# Altium PCB pcb.PcbDoc (part 5 of 6)
Units mm, origin at the board's own origin, x right, y up, seen from the top; angles counter-clockwise.
Board outline 163.6 x 137.4 mm, 4 copper layers (Top Layer, GND2, GND3, Bottom Layer), stack 1.586 mm thick; 362 components, 323 nets, 1261 pads, 657 vias.
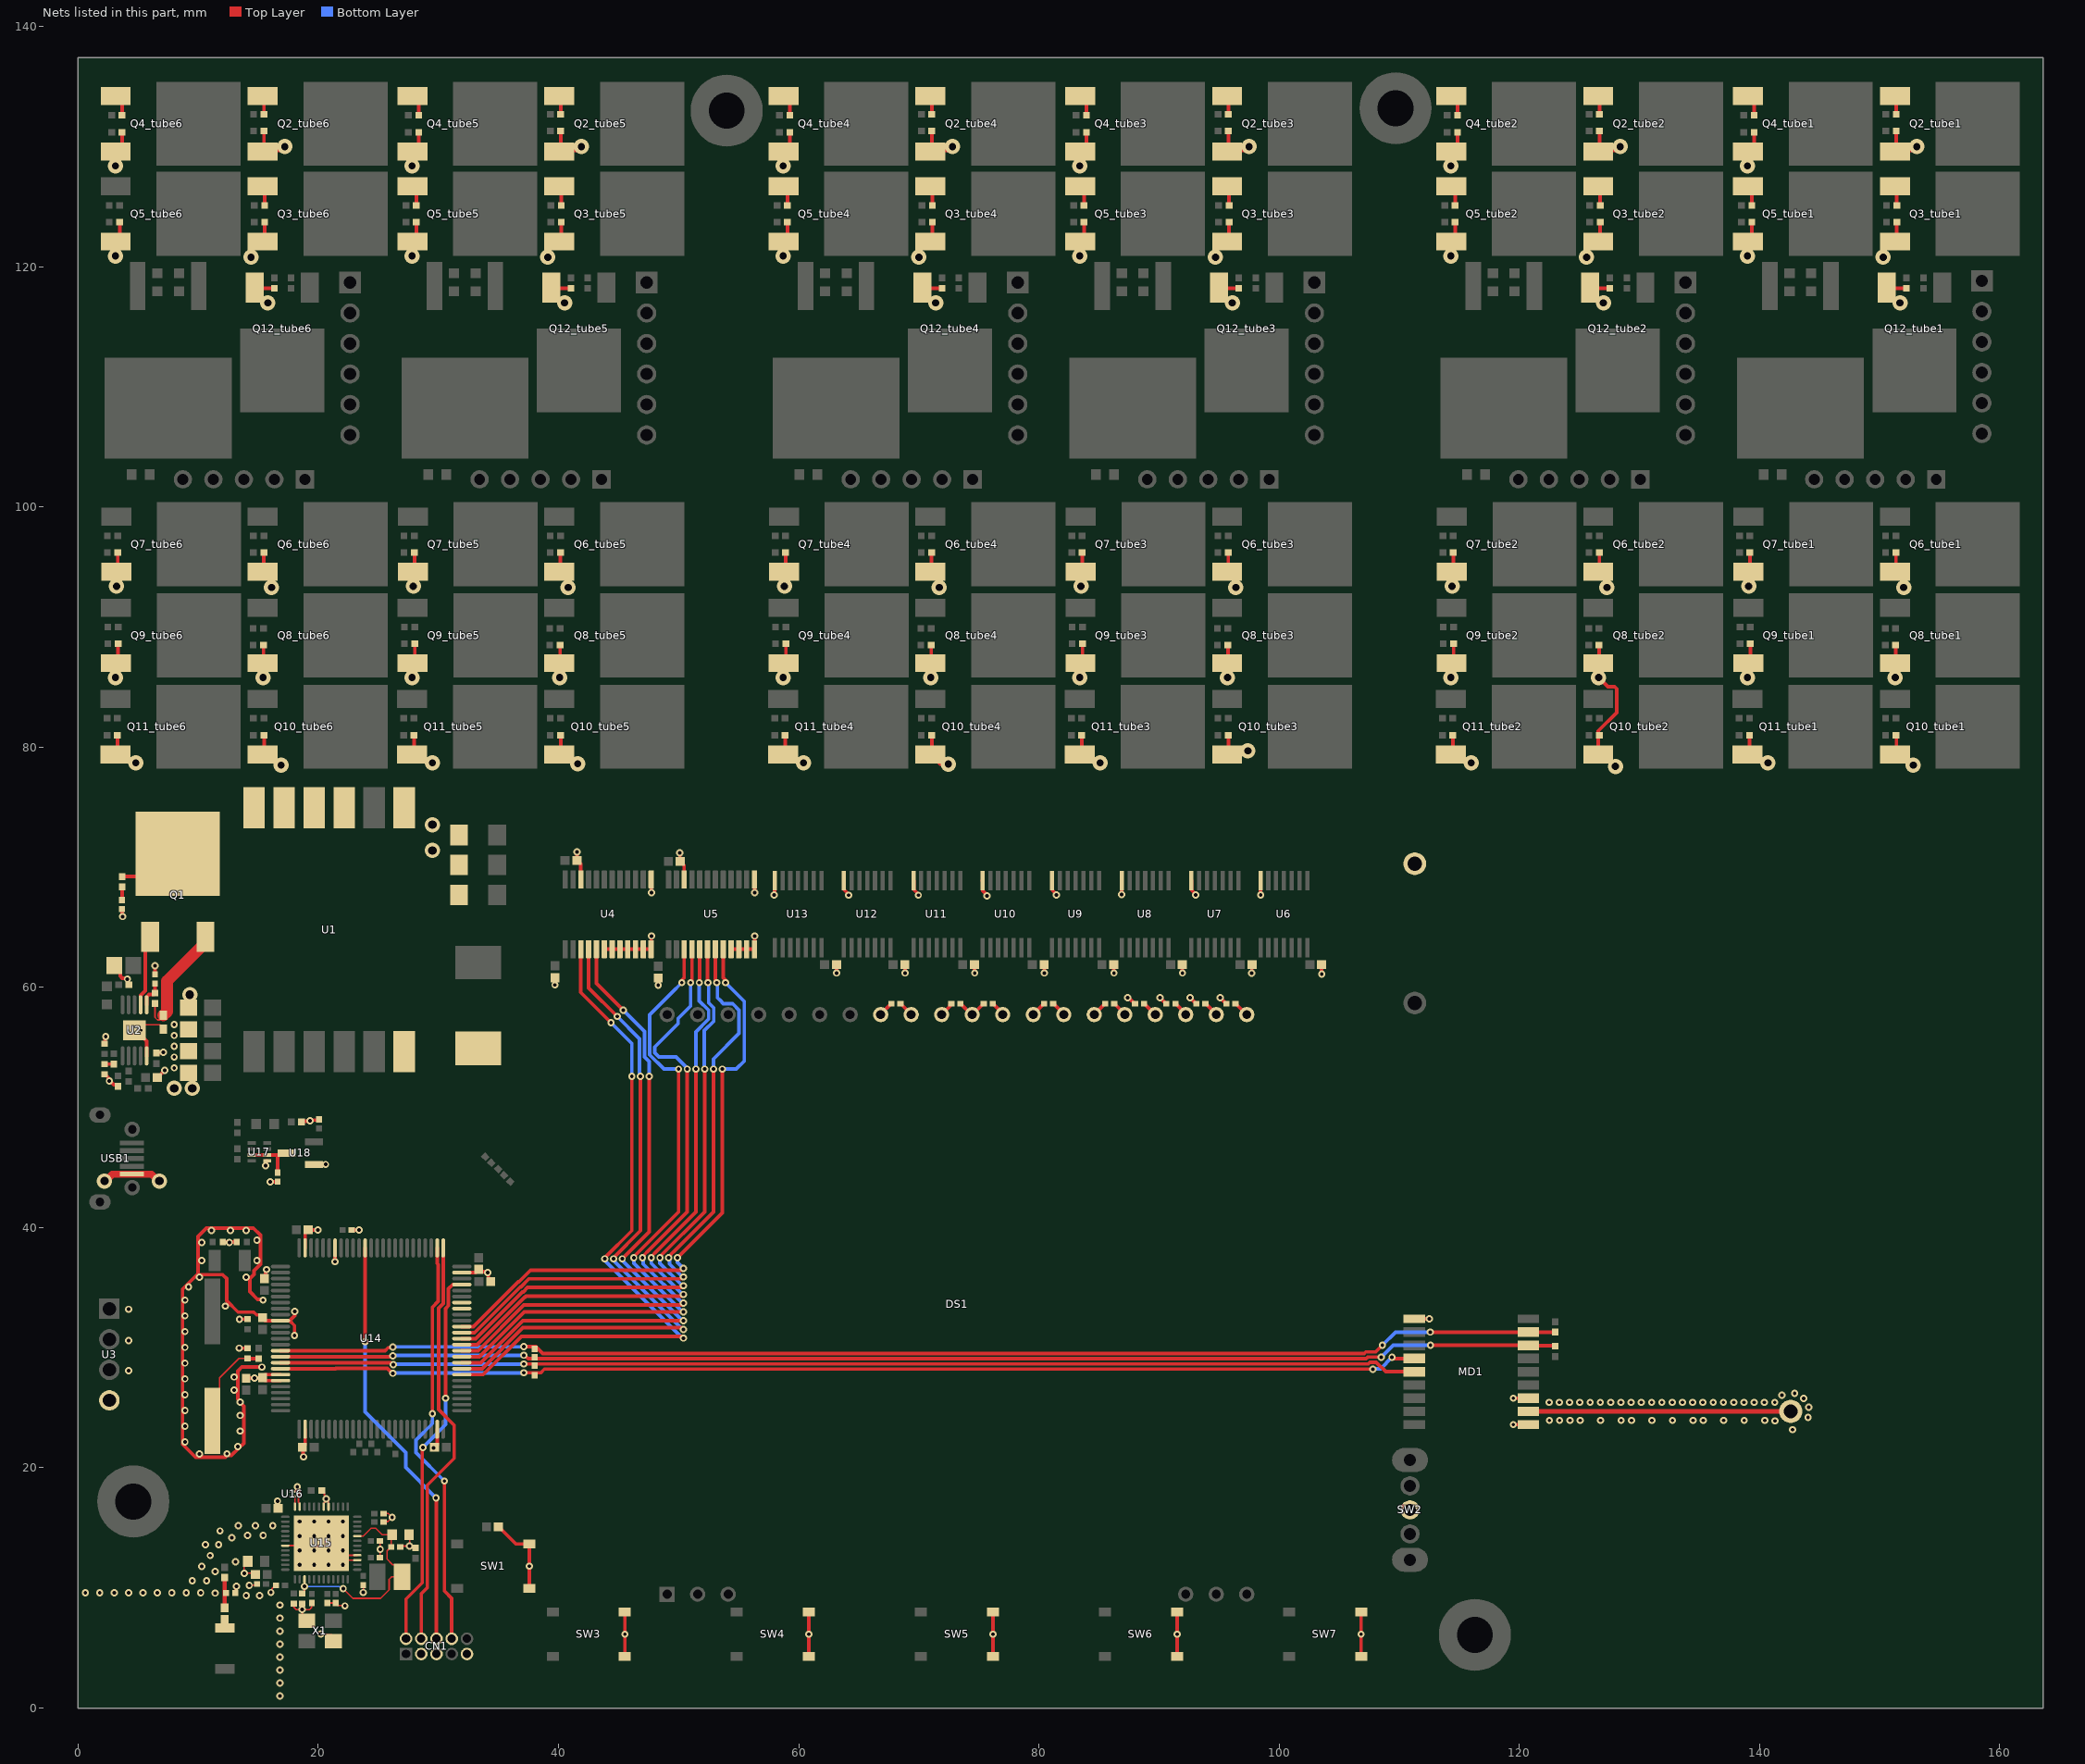
[diagram p6: the nets of this part, all layers, seen from the top]

## Via types
v1: diameter 0.6, hole 0.3, Top Layer to Bottom Layer, 545 vias
v2: diameter 1.27, hole 0.6, Top Layer to Bottom Layer, 97 vias
v3: diameter 1.27, hole 0.711, Top Layer to Bottom Layer, 13 vias
v4: diameter 0.5, hole 0.2, Top Layer to Bottom Layer, 2 vias

## Nets (pads, with @x,y where several pads share a name; then routed paths per layer and width w, separated by ;. In a path a pad name is that pad's centre, name@x,y a point inside that pad or via, vN(x,y) a via of type N, cw(c..) or ccw(c..) an arc to the next point about the centre after c; other vN are vias at no path point) (continued)
GND: C1.1 C2.1 C3.1 C4.1 C5.2 C6.2 C7.2 C8.2 C9.1 C10.1 C11.1 C12.1 C13.2 C14.1 C15.1 C16.1 C17.1 C18.1 C19.1 C20.1 C21.1 C22.1 C23.1 C24.1 C25.1 C26.2 C27.2 C28.2 C29.2 C30.1 C31.1 C32.1 C33.2 C34.2 C35.1 C36.1 C37.2 C38.2 C39.2 C40.2 C42.2 C43.2 C44.2 C45.2 C46.2 C47.2 C48.2 C49.2 C50.2 C51.2 C52.2 C53.2 C54.2 C56.2 C59.2 C60.2 C61.2 C62.2 C63.2 C64.1 C65.1 C66.2 C67.2 C68.2 C69.2 CN1.3 CN1.5 CN1.9 DS1.26 DS1.33 L3.2 MD1.1 MD1.10 MD1.12 Q2_tube1.3 Q2_tube2.3 Q2_tube3.3 Q2_tube4.3 Q2_tube5.3 Q2_tube6.3 Q3_tube1.3 Q3_tube2.3 Q3_tube3.3 Q3_tube4.3 Q3_tube5.3 Q3_tube6.3 Q4_tube1.3 Q4_tube2.3 Q4_tube3.3 Q4_tube4.3 Q4_tube5.3 Q4_tube6.3 Q5_tube1.3 Q5_tube2.3 Q5_tube3.3 Q5_tube4.3 Q5_tube5.3 Q5_tube6.3 Q6_tube1.3 Q6_tube2.3 Q6_tube3.3 Q6_tube4.3 Q6_tube5.3 Q6_tube6.3 Q7_tube1.3 Q7_tube2.3 Q7_tube3.3 Q7_tube4.3 Q7_tube5.3 Q7_tube6.3 Q8_tube1.3 Q8_tube2.3 Q8_tube3.3 Q8_tube4.3 Q8_tube5.3 Q8_tube6.3 Q9_tube1.3 Q9_tube2.3 Q9_tube3.3 Q9_tube4.3 Q9_tube5.3 Q9_tube6.3 Q10_tube1.3 Q10_tube2.3 Q10_tube3.3 Q10_tube4.3 Q10_tube5.3 Q10_tube6.3 Q11_tube1.3 Q11_tube2.3 Q11_tube3.3 Q11_tube4.3 Q11_tube5.3 Q11_tube6.3 Q12_tube1.3 Q12_tube2.3 Q12_tube3.3 Q12_tube4.3 Q12_tube5.3 Q12_tube6.3 R6.1 R7.1 R8.1 R9.1 R11_tube1.2 R11_tube2.2 R11_tube3.2 R11_tube4.2 R11_tube5.2 R11_tube6.2 R13_tube1.2 R13_tube2.2 R13_tube3.2 R13_tube4.2 R13_tube5.2 R13_tube6.2 R15_tube1.2 R15_tube2.2 R15_tube3.2 R15_tube4.2 R15_tube5.2 R15_tube6.2 R17_tube1.2 R17_tube2.2 R17_tube3.2 R17_tube4.2 R17_tube5.2 R17_tube6.2 R19_tube1.2 R19_tube2.2 R19_tube3.2 R19_tube4.2 R19_tube5.2 R19_tube6.2 R21_tube1.2 R21_tube2.2 R21_tube3.2 R21_tube4.2 R21_tube5.2 R21_tube6.2 R23_tube1.2 R23_tube2.2 R23_tube3.2 R23_tube4.2 R23_tube5.2 R23_tube6.2 R25_tube1.2 R25_tube2.2 R25_tube3.2 R25_tube4.2 R25_tube5.2 R25_tube6.2 R27_tube1.2 R27_tube2.2 R27_tube3.2 R27_tube4.2 R27_tube5.2 R27_tube6.2 R29_tube1.2 R29_tube2.2 R29_tube3.2 R29_tube4.2 R29_tube5.2 R29_tube6.2 R32_tube1.1 R32_tube2.1 R32_tube3.1 R32_tube4.1 R32_tube5.1 R32_tube6.1 R37.2 R38.2 R44.1 SW1.1 SW1.3 SW2.2 SW3.2 SW3.4 SW4.2 SW4.4 SW5.2 SW5.4 SW6.2 SW6.4 SW7.2 SW7.4 U1.1 U2.5 U2.11 U3.4 U4.6 U4.7 U4.8 U4.9 U4.10 U4.11 U4.12 U4.13 U4.22 U5.9 U5.10 U5.11 U5.12 U5.13 U5.22 U6.7 U7.7 U8.7 U9.7 U10.7 U11.7 U12.7 U13.7 U14.10 U14.19 U14.20 U14.27 U14.49 U14.74 U14.94 U14.99 U15.7 U15.27 U15.28 U15.41 U15.42 U15.47 U15.49 U15.50 U15.51 U15.52 U15.53 U15.54 U15.55 U15.56 U15.57 U15.58 U15.59 U15.60 U15.61 U15.62 U15.63 U15.64 U15.65 U16.B1 U17.1 U18.1 U20.2 USB1.5 X1.2 X1.4 | length 426.1
  Top Layer w0.127: U2.11@5.175,56.9 6.8,56.9 7.1,56.6 R8.1@7.1,56.525 ; C39.2@14.148,12.323 13.827,12.002 v1(13.827,11.223) 14.658,11.223 C30.1@14.758,11.123 ; v1(14.248,10.223) 14.791,10.223 C40.2@14.891,10.323 ; v1(16.048,9.623) 16.139,9.714 16.139,9.914 16.448,10.223 C51.2@16.47,10.223 ; v1(16.598,17.223) 16.598,16.663 C27.2@16.638,16.623 ; U15.7@16.988,13.523 20.048,13.523 U15.49@20.248,13.723 U15.49@21.248,12.723 ; C43.2@17.948,8.703 17.948,8.423 18.17,8.201 v1@18.66,8.201 ; U16.B1@18.048,18.023 18.048,18.045 18.158,18.154 18.158,18.333 v1(18.248,18.423) 18.248,18.295 18.448,18.095 18.448,17.834 18.343,17.728 18.343,17.501 18.339,17.497 18.339,17.152 18.448,17.043 U15.47@18.448,16.773 ; C42.2@18.648,8.703 18.661,8.691 v1(18.661,8.201) ; X1.4@19.048,7.273 18.661,7.661 v1(18.661,8.201) ; C47.2@19.448,8.744 19.448,8.387 19.262,8.201 v1(18.661,8.201) ; v1(20.205,6.167) 20.262,6.11 21.112,6.11 X1.2@21.349,5.873 ; R38.2@20.281,18.123 20.294,18.123 20.501,17.917 20.501,17.699 20.648,17.551 v1(20.648,17.423) ; U15.42@20.448,16.773 20.448,17.043 20.558,17.152 20.558,17.333 v1(20.648,17.423) ; C48.2@20.748,8.744 C54.2@21.448,8.744 21.57,8.623 21.57,8.602 21.621,8.55 22.172,8.55 v1(22.217,8.505) ; U15.41@20.848,16.773 20.834,16.787 20.834,17.235 20.648,17.421 v1(20.648,17.423) ; U15.27@23.248,12.323 21.648,12.323 U15.49@21.248,12.723 ; U15.28@23.248,12.723 U15.49@21.248,12.723 ; v1(23.748,9.623) C52.2@23.748,10.244 ; C50.2@25.127,12.523 25.148,12.544 v1(25.148,13.223) 25.148,13.902 C53.2@25.127,13.923 ; C49.2@25.427,15.498 25.457,15.528 25.802,15.528 v1(26.148,15.875) 25.825,16.198 C45.2@25.427,16.198 ; C46.2@26.827,13.423 26.889,13.485 v1(27.601,13.485) ; C44.2@27.548,14.423 27.601,14.37 v1(27.601,13.485) ; R37.2@27.948,13.356 27.948,13.43 27.893,13.485 v1(27.601,13.485)
  Top Layer w0.3: C12.1@2.2,52.78 2.22,52.78 2.543,52.457 2.543,52.257 v1(2.6,52.2) 2.681,52.2 2.981,51.9 3.18,51.9 3.3,51.78 R7.1@3.3,51.767 ; C11.1@2.2,55.32 2.25,55.37 2.25,55.85 v1(2.3,55.9) ; C10.1@3,61.825 3.5,61.325 3.5,60.948 3.676,60.772 3.945,60.772 4.019,60.698 v1(4.1,60.698) ; v2(3.1,85.8) 3.1,86.943 Q9_tube6.3@3.158,87 ; v2(3.1,120.9) 3.1,122.075 Q5_tube6.3@3.125,122.1 ; v2(3.2,93.4) 3.2,94.567 Q7_tube6.3@3.167,94.6 ; R29_tube6.2@3.266,81 Q11_tube6.3@3.266,79.776 ; R21_tube6.2@3.3,96.2 Q7_tube6.3@3.3,94.921 ; Q5_tube6.3@3.325,122.1 ccw(c3.004,122.421) 3.458,122.421 R17_tube6.2@3.458,123.7 ; Q9_tube6.3@3.333,87.181 R25_tube6.2@3.333,88.6 ; Q4_tube6.3@3.525,129.6 ccw(c3.204,129.921) 3.658,129.921 R15_tube6.2@3.658,131.2 ; C4.1@3.65,66.521 3.675,66.496 3.675,65.925 v1(3.7,65.9) ; U2.11@4.7,56.425 4.8,56.425 5.7,55.525 U2.5@5.7,54.3 ; v2(4.8,78.7) 4.7,78.8 3.71,78.8 Q11_tube6.3@3.11,79.4 ; C9.1@6.4,61.079 v1(6.4,61.8) ; R9.1@6.5,54.533 6.534,54.566 7.066,54.566 v1(7.1,54.6) ; C13.2@6.59,52.5 6.61,52.5 7.2,53.09 v1(7.2,53.1) ; v1@9.913,36.088 12.036,36.088 12.374,35.75 12.374,33.906 13.314,32.965 14.62,32.965 14.855,32.73 15.149,32.73 15.359,32.52 C33.2@15.359,32.5 15.359,32.48 15.579,32.26 U14.10@17.604,32.26 ; C32.1@12.034,38.815 12.059,38.79 12.565,38.79 v1(12.59,38.765) 12.615,38.79 13.169,38.79 C31.1@13.194,38.815 ; L3.2@13.08,9.573 13.133,9.627 13.133,10.093 v1(13.187,10.146) ; v1(13.414,29.965) 13.422,29.958 14.107,29.958 C36.1@14.114,29.95 ; v1(13.434,32.378) 13.441,32.385 C35.1@14.114,32.385 ; C34.2@13.99,27.455 13.995,27.46 14.685,27.46 v1(14.69,27.465) 14.708,27.483 15.357,27.483 C37.2@15.359,27.48 ; v2(14.4,120.8) 14.4,121.5 15,122.1 Q3_tube6.3@15.369,122.1 ; Q12_tube6.3@14.7,118.275 14.807,118.168 14.807,117.668 15.3,117.175 15.625,117.175 v2(15.8,117) ; Q12_tube6.3@14.852,118.212 R32_tube6.1@16.343,118.212 ; v1(15.3,28.388) 13.626,28.388 13.29,28.052 13.29,25.746 13.505,25.532 13.505,25.425 13.79,25.139 13.79,22.053 13.396,21.659 12.764,21.027 12.39,21.027 12.248,20.885 9.77,20.885 8.69,21.965 8.69,34.865 9.04,35.215 9.89,36.065 9.952,36.127 9.993,36.127 9.993,39.268 10.69,39.965 14.59,39.965 15.19,39.365 15.19,36.965 14.641,36.416 14.641,36.109 14.29,35.757 14.29,34.669 14.933,34.025 15.343,34.025 v1(15.4,33.968) ; C37.2@15.322,27.495 15.322,27.517 15.565,27.76 U14.19@16.849,27.76 ; C37.2@15.359,27.5 C37.2@15.359,27.48 ; Q8_tube6.3@15.369,87 15.4,86.969 v2(15.4,85.8) ; Q3_tube6.3@15.4,122.1 ccw(c15.079,122.421) 15.533,122.421 R13_tube6.2@15.533,123.7 ; Q8_tube6.3@15.433,86.979 R23_tube6.2@15.433,88.5 ; R19_tube6.2@15.466,96.2 15.466,94.832 cw(c15.137,94.832) Q6_tube6.3@15.369,94.6 15.5,94.6 16.1,94 v2(16.1,93.3) ; Q2_tube6.3@15.477,129.96 R11_tube6.2@15.477,131.3 ; R27_tube6.2@15.498,81.03 15.498,79.71 cw(c15.059,79.71) Q10_tube6.3@15.369,79.4 15.869,79.4 16.77,78.5 v2(16.9,78.5) ; C29.2@15.514,35.775 C29.2@15.514,35.755 15.622,35.863 15.622,36.453 v1(15.679,36.51) ; v1(15.608,45.157) 15.665,45.214 15.665,45.54 15.675,45.55 U17.1@15.74,45.55 ; v1(16,43.8) 16.011,43.811 16.589,43.811 C64.1@16.6,43.821 ; U14.20@16.849,27.26 15.579,27.26 C37.2@15.359,27.48 ; v1(18.02,31.01) 18.02,31.844 U14.10@17.604,32.26 ; v1(18.028,33.015) 18.028,32.684 U14.10@17.604,32.26 ; R44.1@18.6,48.8 18.65,48.85 19.25,48.85 v1(19.3,48.9) 19.353,48.953 20.002,48.953 C65.1@20.055,49.007 ; v1(18.759,20.91) 18.714,20.955 18.714,21.665 C67.2@18.669,21.71 18.689,21.71 18.899,21.92 U14.27@18.899,23.21 ; U14.99@18.899,38.31 18.899,39.58 19.129,39.81 C28.2@19.149,39.81 v1(19.959,39.81) ; U18.1@19.65,45.25 19.656,45.256 20.597,45.256 v1(20.603,45.263) ; v1(21.39,37.165) 21.399,37.174 U14.94@21.399,38.31 ; C26.2@22.779,39.8 v1(23.4,39.8) ; v2(27.8,85.8) 27.8,86.943 Q9_tube5.3@27.858,87 ; v2(27.8,120.9) 27.8,122.075 Q5_tube5.3@27.825,122.1 ; v2(27.9,93.4) 27.9,94.567 Q7_tube5.3@27.867,94.6 ; R29_tube5.2@27.966,81 Q11_tube5.3@27.966,79.776 ; R21_tube5.2@28,96.2 Q7_tube5.3@28,94.921 ; Q5_tube5.3@28.025,122.1 ccw(c27.704,122.421) Q5_tube5.3@28.158,122.421 ; Q9_tube5.3@28.033,87.181 R25_tube5.2@28.033,88.6 ; Q5_tube5.3@28.158,122.421 R17_tube5.2@28.158,123.7 ; Q4_tube5.3@28.225,129.6 ccw(c27.904,129.921) 28.358,129.921 R15_tube5.2@28.358,131.2 ; v2(29.5,78.7) 29.4,78.8 28.41,78.8 Q11_tube5.3@27.81,79.4 ; v1(29.609,21.65) C69.2@29.669,21.71 ; C69.2@29.689,21.71 29.9,21.92 U14.49@29.9,23.21 ; U14.74@31.949,36.26 33.119,36.26 33.359,36.5 C66.2@33.359,36.52 33.557,36.322 34.043,36.322 v1(34.1,36.265) 34.157,36.208 34.157,35.702 C68.2@34.349,35.51 ; C38.2@34.99,15.1 35.01,15.1 36.45,13.66 SW1.3@37.565,13.66 v1(37.565,11.81) SW1.1@37.565,9.96 ; v2(39.1,120.8) 39.1,121.5 39.7,122.1 Q3_tube5.3@40.069,122.1 ; Q12_tube5.3@39.4,118.275 39.507,118.168 39.507,117.668 40,117.175 40.325,117.175 v2(40.5,117) ; Q12_tube5.3@39.552,118.212 R32_tube5.1@41.043,118.212 ; v1(39.7,60.2) C14.1@39.7,60.81 ; Q8_tube5.3@40.069,87 40.1,86.969 v2(40.1,85.8) ; Q3_tube5.3@40.1,122.1 ccw(c39.779,122.421) 40.233,122.421 R13_tube5.2@40.233,123.7 ; Q8_tube5.3@40.133,86.979 R23_tube5.2@40.133,88.5 ; R19_tube5.2@40.166,96.2 40.166,94.832 cw(c39.837,94.832) Q6_tube5.3@40.069,94.6 40.2,94.6 40.8,94 v2(40.8,93.3) ; Q2_tube5.3@40.177,129.96 R11_tube5.2@40.177,131.3 ; R27_tube5.2@40.198,81.03 40.198,79.71 cw(c39.759,79.71) Q10_tube5.3@40.069,79.4 40.563,79.4 41.152,78.811 41.414,78.811 v2(41.6,78.626) ; v1(41.535,71.281) 41.53,71.276 41.53,70.586 C16.1@41.525,70.581 41.545,70.581 41.86,70.266 U4.22@41.86,68.981 ; U4.6@43.81,63.181 U4.7@44.46,63.181 U4.8@45.11,63.181 U4.9@45.76,63.181 U4.10@46.41,63.181 U4.11@47.06,63.181 U4.12@47.71,63.181 47.722,63.193 47.722,64.268 v1(47.735,64.281) ; SW3.4@45.523,4.3 v1(45.523,6.15) SW3.2@45.523,8 ; U4.13@47.71,68.981 47.722,68.968 47.722,67.893 v1(47.735,67.881) ; v1(48.3,60.175) C15.1@48.3,60.785 ; v1(50.1,71.2) 50.112,71.188 50.112,70.493 C17.1@50.125,70.481 50.145,70.481 50.46,70.166 U5.22@50.46,68.981 ; U5.9@54.36,63.181 U5.10@55.01,63.181 U5.11@55.66,63.181 U5.12@56.31,63.181 56.322,63.193 56.322,64.268 v1(56.335,64.281) ; U5.13@56.31,68.981 56.322,68.968 56.322,67.893 v1(56.335,67.881) ; v1(57.95,67.7) 57.975,67.725 57.975,68.875 U13.7@58,68.9 ; v2(58.7,85.8) 58.7,86.942 Q9_tube4.3@58.758,87 ; v2(58.7,120.9) 58.7,122.075 Q5_tube4.3@58.725,122.1 ; v2(58.8,93.4) 58.8,94.567 Q7_tube4.3@58.767,94.6 ; R29_tube4.2@58.866,81 Q11_tube4.3@58.866,79.776 ; R21_tube4.2@58.9,96.2 Q7_tube4.3@58.9,94.921 ; Q5_tube4.3@58.925,122.1 ccw(c58.604,122.421) 59.058,122.421 R17_tube4.2@59.058,123.7 ; Q9_tube4.3@58.933,87.181 R25_tube4.2@58.933,88.6 ; Q4_tube4.3@59.125,129.6 ccw(c58.804,129.921) 59.258,129.921 R15_tube4.2@59.258,131.2 ; v2(60.4,78.7) 60.3,78.8 59.31,78.8 Q11_tube4.3@58.71,79.4 ; SW4.4@60.848,4.3 v1(60.848,6.15) SW4.2@60.848,8 ; C25.1@63.14,61.9 63.145,61.895 63.145,61.205 v1(63.15,61.2) ; U12.7@63.75,68.9 63.775,68.875 63.775,68.145 64.161,67.759 v1(64.161,67.678) ; DS1.33@66.824,57.737 66.824,57.776 67.685,58.637 C56.2@67.707,58.637 ; C24.1@68.84,61.9 68.845,61.895 68.845,61.205 v1(68.85,61.2) ; U11.7@69.55,68.9 69.575,68.875 69.575,68.145 69.961,67.759 v1(69.961,67.678) ; v2(70,120.8) 70,121.5 70.6,122.1 Q3_tube4.3@70.969,122.1 ; Q12_tube4.3@70.3,118.275 70.407,118.168 70.407,117.668 70.9,117.175 71.225,117.175 v2(71.4,117) ; Q12_tube4.3@70.452,118.212 R32_tube4.1@71.943,118.212 ; Q8_tube4.3@70.969,87 71,86.969 v2(71,85.8) ; Q3_tube4.3@71,122.1 ccw(c70.679,122.421) 71.133,122.421 R13_tube4.2@71.133,123.7 ; Q8_tube4.3@71.033,86.979 R23_tube4.2@71.033,88.5 ; R19_tube4.2@71.066,96.2 71.066,94.832 cw(c70.737,94.832) Q6_tube4.3@70.969,94.6 71.1,94.6 71.7,94 v2(71.7,93.3) ; Q2_tube4.3@71.077,129.96 R11_tube4.2@71.077,131.3 ; R27_tube4.2@71.098,81.03 71.098,79.71 cw(c70.659,79.71) Q10_tube4.3@70.969,79.4 ; Q10_tube4.3@71.569,78.8 Q10_tube4.3@70.969,79.4 ; v2(72.449,78.598) 71.772,78.598 Q10_tube4.3@70.969,79.4 ; C23.1@74.63,61.9 74.64,61.89 74.64,61.21 v1(74.65,61.2) ; U10.7@75.3,68.9 75.325,68.875 75.325,68.048 75.677,67.696 v1(75.677,67.615) ; SW5.4@76.174,4.3 v1(76.174,6.15) SW5.2@76.174,8 ; C22.1@80.43,61.9 80.44,61.89 80.44,61.21 v1(80.45,61.2) ; U9.7@81.1,68.9 81.125,68.875 81.125,68.097 81.448,67.773 v1(81.448,67.692) ; v2(83.4,85.8) 83.4,86.942 Q9_tube3.3@83.458,87 ; v2(83.4,120.9) 83.4,122.075 Q5_tube3.3@83.425,122.1 ; v2(83.5,93.4) 83.5,94.567 Q7_tube3.3@83.467,94.6 ; R29_tube3.2@83.566,81 Q11_tube3.3@83.566,79.776 ; R21_tube3.2@83.6,96.2 Q7_tube3.3@83.6,94.921 ; Q5_tube3.3@83.625,122.1 ccw(c83.304,122.421) 83.758,122.421 R17_tube3.2@83.758,123.7 ; Q9_tube3.3@83.633,87.181 R25_tube3.2@83.633,88.6 ; Q4_tube3.3@83.825,129.6 ccw(c83.504,129.921) 83.958,129.921 R15_tube3.2@83.958,131.2 ; DS1.26@84.604,57.737 84.604,57.756 85.485,58.637 C59.2@85.507,58.637 ; v2(85.1,78.7) 85,78.8 84.01,78.8 Q11_tube3.3@83.41,79.4 ; C21.1@86.23,61.9 86.24,61.89 86.24,61.21 v1(86.25,61.2) ; v1(86.875,67.745) 86.888,67.757 86.888,68.887 U8.7@86.9,68.9 ; v1(87.385,59.137) 87.443,59.08 87.543,59.08 87.985,58.637 C60.2@88.007,58.637 ; v1(90.085,59.137) 90.585,58.637 C61.2@90.607,58.637 ; SW6.4@91.5,4.3 v1(91.5,6.15) SW6.2@91.5,8 ; C20.1@91.94,61.9 91.945,61.895 91.945,61.205 v1(91.95,61.2) ; v1(92.585,59.137) 93.085,58.637 C62.2@93.107,58.637 ; U7.7@92.7,68.9 92.7,68.275 92.725,68.25 92.725,68.097 93.048,67.773 v1(93.048,67.692) ; v2(94.7,120.8) 94.7,121.5 95.3,122.1 Q3_tube3.3@95.669,122.1 ; Q12_tube3.3@95,118.275 95.107,118.168 95.107,117.668 95.6,117.175 95.925,117.175 v2(96.1,117) ; v1(95.085,59.137) 95.585,58.637 C63.2@95.607,58.637 ; Q12_tube3.3@95.152,118.212 R32_tube3.1@96.643,118.212 ; Q8_tube3.3@95.669,87 95.7,86.969 v2(95.7,85.8) ; Q3_tube3.3@95.7,122.1 ccw(c95.379,122.421) 95.833,122.421 R13_tube3.2@95.833,123.7 ; Q8_tube3.3@95.733,86.979 R23_tube3.2@95.733,88.5 ; R19_tube3.2@95.766,96.2 95.766,94.832 cw(c95.437,94.832) Q6_tube3.3@95.669,94.6 95.8,94.6 96.4,94 v2(96.4,93.3) ; Q2_tube3.3@95.777,129.96 R11_tube3.2@95.777,131.3 ; Q10_tube3.3@95.798,79.71 R27_tube3.2@95.798,81.03 ; Q10_tube3.3@96.269,78.8 Q10_tube3.3@95.669,79.4 95.969,79.7 v2(97.4,79.7) ; v1(97.723,61.185) 97.731,61.193 97.731,61.891 C19.1@97.74,61.9 ; U6.7@98.45,68.9 98.455,68.895 98.455,67.71 v1(98.46,67.705) ; C18.1@103.54,61.9 103.545,61.895 103.545,61.105 v1(103.55,61.1) ; SW7.4@106.826,4.3 v1(106.826,6.15) SW7.2@106.826,8 ; MD1.1@111.25,32.4 v1(112.5,32.4) ; v2(114.3,85.8) 114.3,86.942 Q9_tube2.3@114.358,87 ; v2(114.3,120.9) 114.3,122.075 Q5_tube2.3@114.325,122.1 ; v2(114.4,93.4) 114.4,94.567 Q7_tube2.3@114.367,94.6 ; R29_tube2.2@114.466,81 Q11_tube2.3@114.466,79.776 ; R21_tube2.2@114.5,96.2 Q7_tube2.3@114.5,94.921 ; Q5_tube2.3@114.525,122.1 ccw(c114.204,122.421) 114.658,122.421 R17_tube2.2@114.658,123.7 ; Q9_tube2.3@114.533,87.181 R25_tube2.2@114.533,88.6 ; Q4_tube2.3@114.725,129.6 ccw(c114.404,129.921) 114.858,129.921 R15_tube2.2@114.858,131.2 ; v2(116,78.7) 115.9,78.8 114.91,78.8 Q11_tube2.3@114.31,79.4 ; v1(119.5,23.6) MD1.10@120.75,23.6 ; v1(119.5,25.8) MD1.12@120.75,25.8 ; v2(125.6,120.8) 125.6,121.5 126.2,122.1 Q3_tube2.3@126.569,122.1 ; Q12_tube2.3@125.9,118.275 126.007,118.168 126.007,117.668 126.5,117.175 126.825,117.175 v2(127,117) ; Q12_tube2.3@126.052,118.212 R32_tube2.1@127.543,118.212 ; Q8_tube2.3@126.569,87 126.6,86.969 v2(126.6,85.8) 127.373,85.027 127.934,85.027 128.096,84.865 128.096,82.886 126.569,81.359 Q10_tube2.3@126.569,79.4 127.069,79.4 128,78.47 v2(128,78.4) ; Q3_tube2.3@126.6,122.1 ccw(c126.279,122.421) 126.733,122.421 R13_tube2.2@126.733,123.7 ; Q8_tube2.3@126.633,86.979 R23_tube2.2@126.633,88.5 ; R19_tube2.2@126.666,96.2 126.666,94.832 cw(c126.337,94.832) Q6_tube2.3@126.569,94.6 126.7,94.6 127.3,94 v2(127.3,93.3) ; Q2_tube2.3@126.677,129.96 R11_tube2.2@126.677,131.3 ; v2(139,85.8) 139,86.942 Q9_tube1.3@139.058,87 ; v2(139,120.9) 139,122.075 Q5_tube1.3@139.025,122.1 ; v2(139.1,93.4) 139.1,94.567 Q7_tube1.3@139.067,94.6 ; R29_tube1.2@139.166,81 Q11_tube1.3@139.166,79.776 ; R21_tube1.2@139.2,96.2 Q7_tube1.3@139.2,94.921 ; Q5_tube1.3@139.225,122.1 ccw(c138.904,122.421) 139.358,122.421 R17_tube1.2@139.358,123.7 ; Q9_tube1.3@139.233,87.181 R25_tube1.2@139.233,88.6 ; Q4_tube1.3@139.425,129.6 ccw(c139.104,129.921) 139.558,129.921 R15_tube1.2@139.558,131.2 ; v2(140.7,78.7) 140.6,78.8 139.61,78.8 Q11_tube1.3@139.01,79.4 ; v2(150.3,120.8) 150.3,121.5 150.9,122.1 Q3_tube1.3@151.269,122.1 ; Q12_tube1.3@150.6,118.275 150.707,118.168 150.707,117.668 151.2,117.175 151.525,117.175 v2(151.7,117) ; Q12_tube1.3@150.752,118.212 R32_tube1.1@152.243,118.212 ; Q8_tube1.3@151.269,87 151.3,86.969 v2(151.3,85.8) ; Q3_tube1.3@151.3,122.1 ccw(c150.979,122.421) 151.433,122.421 R13_tube1.2@151.433,123.7 ; Q8_tube1.3@151.333,86.979 R23_tube1.2@151.333,88.5 ; R19_tube1.2@151.366,96.2 151.366,94.832 cw(c151.037,94.832) Q6_tube1.3@151.269,94.6 151.4,94.6 152,94 v2(152,93.3) ; Q2_tube1.3@151.377,129.96 R11_tube1.2@151.377,131.3 ; R27_tube1.2@151.398,81.03 151.398,79.71 cw(c150.959,79.71) Q10_tube1.3@151.269,79.4 ; Q10_tube1.3@151.869,78.8 Q10_tube1.3@151.269,79.4 ; v2(152.8,78.5) 152.67,78.5 151.769,79.4 Q10_tube1.3@151.269,79.4 ; Q11_tube6.3@3.11,79.4 ccw(c2.734,79.776) Q11_tube6.3@3.266,79.776 ; Q11_tube6.3@3.11,79.4 ccw(c2.734,79.776) Q11_tube6.3@3.266,79.776 ; Q11_tube6.3@3.11,79.4 ccw(c2.734,79.776) Q11_tube6.3@3.266,79.776 ; Q11_tube6.3@3.11,79.4 ccw(c2.734,79.776) Q11_tube6.3@3.266,79.776 ; Q7_tube6.3@3.167,94.6 ccw(c2.847,94.921) Q7_tube6.3@3.3,94.921 ; Q7_tube6.3@3.167,94.6 ccw(c2.847,94.921) Q7_tube6.3@3.3,94.921 ; Q7_tube6.3@3.167,94.6 ccw(c2.847,94.921) Q7_tube6.3@3.3,94.921 ; Q7_tube6.3@3.167,94.6 ccw(c2.847,94.921) Q7_tube6.3@3.3,94.921 ; Q11_tube5.3@27.81,79.4 ccw(c27.434,79.776) Q11_tube5.3@27.966,79.776 ; Q11_tube5.3@27.81,79.4 ccw(c27.434,79.776) Q11_tube5.3@27.966,79.776 ; Q11_tube5.3@27.81,79.4 ccw(c27.434,79.776) Q11_tube5.3@27.966,79.776 ; Q11_tube5.3@27.81,79.4 ccw(c27.434,79.776) Q11_tube5.3@27.966,79.776 ; Q7_tube5.3@27.867,94.6 ccw(c27.547,94.921) Q7_tube5.3@28,94.921 ; Q7_tube5.3@27.867,94.6 ccw(c27.547,94.921) Q7_tube5.3@28,94.921 ; Q7_tube5.3@27.867,94.6 ccw(c27.547,94.921) Q7_tube5.3@28,94.921 ; Q7_tube5.3@27.867,94.6 ccw(c27.547,94.921) Q7_tube5.3@28,94.921 ; Q11_tube4.3@58.71,79.4 ccw(c58.334,79.776) Q11_tube4.3@58.866,79.776 ; Q11_tube4.3@58.71,79.4 ccw(c58.334,79.776) Q11_tube4.3@58.866,79.776 ; Q11_tube4.3@58.71,79.4 ccw(c58.334,79.776) Q11_tube4.3@58.866,79.776 ; Q11_tube4.3@58.71,79.4 ccw(c58.334,79.776) Q11_tube4.3@58.866,79.776 ; Q7_tube4.3@58.767,94.6 ccw(c58.447,94.921) Q7_tube4.3@58.9,94.921 ; Q7_tube4.3@58.767,94.6 ccw(c58.447,94.921) Q7_tube4.3@58.9,94.921 ; Q7_tube4.3@58.767,94.6 ccw(c58.447,94.921) Q7_tube4.3@58.9,94.921 ; Q7_tube4.3@58.767,94.6 ccw(c58.447,94.921) Q7_tube4.3@58.9,94.921 ; Q11_tube3.3@83.41,79.4 ccw(c83.034,79.776) Q11_tube3.3@83.566,79.776 ; Q11_tube3.3@83.41,79.4 ccw(c83.034,79.776) Q11_tube3.3@83.566,79.776 ; Q11_tube3.3@83.41,79.4 ccw(c83.034,79.776) Q11_tube3.3@83.566,79.776 ; Q11_tube3.3@83.41,79.4 ccw(c83.034,79.776) Q11_tube3.3@83.566,79.776 ; Q7_tube3.3@83.467,94.6 ccw(c83.147,94.921) Q7_tube3.3@83.6,94.921 ; Q7_tube3.3@83.467,94.6 ccw(c83.147,94.921) Q7_tube3.3@83.6,94.921 ; Q7_tube3.3@83.467,94.6 ccw(c83.147,94.921) Q7_tube3.3@83.6,94.921 ; Q7_tube3.3@83.467,94.6 ccw(c83.147,94.921) Q7_tube3.3@83.6,94.921 ; Q11_tube2.3@114.31,79.4 ccw(c113.934,79.776) Q11_tube2.3@114.466,79.776 ; Q11_tube2.3@114.31,79.4 ccw(c113.934,79.776) Q11_tube2.3@114.466,79.776 ; Q11_tube2.3@114.31,79.4 ccw(c113.934,79.776) Q11_tube2.3@114.466,79.776 ; Q11_tube2.3@114.31,79.4 ccw(c113.934,79.776) Q11_tube2.3@114.466,79.776 ; Q7_tube2.3@114.367,94.6 ccw(c114.047,94.921) Q7_tube2.3@114.5,94.921 ; Q7_tube2.3@114.367,94.6 ccw(c114.047,94.921) Q7_tube2.3@114.5,94.921 ; Q7_tube2.3@114.367,94.6 ccw(c114.047,94.921) Q7_tube2.3@114.5,94.921 ; Q7_tube2.3@114.367,94.6 ccw(c114.047,94.921) Q7_tube2.3@114.5,94.921 ; Q11_tube1.3@139.01,79.4 ccw(c138.634,79.776) Q11_tube1.3@139.166,79.776 ; Q11_tube1.3@139.01,79.4 ccw(c138.634,79.776) Q11_tube1.3@139.166,79.776 ; Q11_tube1.3@139.01,79.4 ccw(c138.634,79.776) Q11_tube1.3@139.166,79.776 ; Q11_tube1.3@139.01,79.4 ccw(c138.634,79.776) Q11_tube1.3@139.166,79.776 ; Q7_tube1.3@139.067,94.6 ccw(c138.747,94.921) Q7_tube1.3@139.2,94.921 ; Q7_tube1.3@139.067,94.6 ccw(c138.747,94.921) Q7_tube1.3@139.2,94.921 ; Q7_tube1.3@139.067,94.6 ccw(c138.747,94.921) Q7_tube1.3@139.2,94.921 ; Q7_tube1.3@139.067,94.6 ccw(c138.747,94.921) Q7_tube1.3@139.2,94.921
  Top Layer w0.6: v3(2.197,43.88) 2.293,43.88 2.858,44.446 4.483,44.446 6.104,44.446 6.669,43.881 v3(6.765,43.881)
  Top Layer w0.7: v2(3.1,128.4) 3.1,129.575 Q4_tube6.3@3.125,129.6 ; Q2_tube6.3@15.369,129.6 15.66,129.891 17.091,129.891 v2(17.2,130) ; v2(27.8,128.4) 27.8,129.575 Q4_tube5.3@27.825,129.6 ; Q2_tube5.3@40.069,129.6 40.36,129.891 41.791,129.891 v2(41.9,130) ; v2(58.7,128.4) 58.7,129.575 Q4_tube4.3@58.725,129.6 ; Q2_tube4.3@70.969,129.6 71.26,129.891 72.691,129.891 v2(72.8,130) ; v2(83.4,128.4) 83.4,129.575 Q4_tube3.3@83.425,129.6 ; Q2_tube3.3@95.669,129.6 95.96,129.891 97.391,129.891 v2(97.5,130) ; v2(114.3,128.4) 114.3,129.575 Q4_tube2.3@114.325,129.6 ; Q2_tube2.3@126.569,129.6 126.86,129.891 128.291,129.891 v2(128.4,130) ; v2(139,128.4) 139,129.575 Q4_tube1.3@139.025,129.6 ; Q2_tube1.3@151.269,129.6 151.56,129.891 152.991,129.891 v2(153.1,130)
  other v1: 16.8,1 16.8,2.082 16.802,3.164 16.802,4.246 16.802,5.328 16.802,6.41 16.802,7.491 16.802,8.573 14.002,9.373 15.102,9.373 11.402,9.573 0.6,9.6 1.8,9.6 3,9.6 4.201,9.6 5.401,9.6 6.601,9.6 7.801,9.6 9.001,9.6 10.202,9.6 9.5,10.6 10.7,10.6 11.402,11.373 10.3,11.8 13.102,12.173 11,12.7 10.6,13.6 11.7,13.6 12.802,14.173 14.102,14.373 15.402,14.373 11.817,14.746 13.335,15.173 14.768,15.173 16.202,15.173 10.09,21.165 12.39,21.177 13.29,21.765 8.89,22.165 13.49,23.065 142.756,23.177 8.89,23.476 141.29,23.909 122.502,23.948 123.356,23.948 124.21,23.948 125.064,23.948 126.772,23.948 128.48,23.948 129.334,23.948 131.042,23.948 132.75,23.948 134.458,23.948 135.312,23.948 137.02,23.948 138.728,23.948 140.436,23.948 144.046,24.192 13.49,24.365 8.89,24.787 144.094,25.045 122.476,25.452 123.33,25.452 124.184,25.452 125.038,25.452 125.892,25.452 126.746,25.452 127.6,25.452 128.454,25.452 129.308,25.452 130.162,25.452 131.016,25.452 131.87,25.452 132.724,25.452 133.578,25.452 134.432,25.452 135.286,25.452 136.14,25.452 136.994,25.452 137.848,25.452 138.702,25.452 139.556,25.452 140.41,25.452 141.264,25.452 13.49,25.465 143.674,25.789 141.874,26.05 8.89,26.098 142.926,26.2 12.99,26.465 8.89,27.409 12.99,27.565 4.2,28.1 8.89,28.721 8.89,30.032 4.2,30.6 8.89,31.343 8.89,32.654 4.2,33.2 12.267,33.465 8.89,33.965 9.19,35.065 10.09,35.865 13.99,35.865 10.29,37.265 14.89,37.265 10.29,38.765 14.89,38.965 11.09,39.765 12.69,39.765 13.99,39.765 8,53.3 8,54.2 8,55.1 8,56 8,56.9
  other v3: 8,51.6 9.5,51.6 9.3,59.4 29.5,71.4 29.5,73.55
  other v4: 4.15,56.425 5.25,56.425
GPIO_C6: U5.6 U14.63 | length 51.2
  Top Layer w0.3: U14.63@31.949,30.76 33.107,30.76 36.993,34.646 37.054,34.646 37.42,35.012 50.25,35.012 v1(50.4,35.162) ; v1(48.446,37.5) 48.446,37.589 52.173,41.316 v1(52.173,53.2) ; U5.6@52.41,63.181 52.41,60.438 v1(52.448,60.4)
  Bottom Layer w0.3: v1(48.446,37.5) 48.446,37.027 50.311,35.162 v1(50.4,35.162) ; v1(52.173,53.2) 52.148,53.225 52.148,56.407 52.923,57.182 52.923,58.291 52.496,58.718 52.496,60.352 v1(52.448,60.4)
GPIO_C7: U5.7 U14.64 | length 51.9
  Top Layer w0.3: U14.64@31.949,31.26 33.003,31.26 36.816,35.073 36.877,35.073 37.543,35.739 50.25,35.739 v1(50.4,35.889) ; v1(49.173,37.5) 49.173,37.581 49.323,37.731 49.323,37.739 49.661,38.077 52.9,41.316 v1(52.9,53.2) ; U5.7@53.06,63.181 53.06,60.515 v1(53.175,60.4)
  Bottom Layer w0.3: v1(49.173,37.5) 49.23,37.443 49.23,36.97 50.311,35.889 v1(50.4,35.889) ; v1(52.9,53.2) 52.9,54.043 55.036,56.18 55.036,58.115 54.502,58.649 53.726,58.649 53.475,58.899 53.232,59.142 53.232,60.343 v1(53.175,60.4)
GPIO_C8: U5.8 U14.65 | length 51
  Top Layer w0.3: U14.65@31.949,31.76 32.899,31.76 36.639,35.5 36.7,35.5 37.666,36.466 50.25,36.466 v1(50.4,36.616) ; v1(49.9,37.5) 53.627,41.227 v1(53.627,53.2) ; U5.8@53.71,63.181 53.71,60.8 53.902,60.607 v1(53.902,60.4)
  Bottom Layer w0.3: v1(49.9,37.5) 49.9,37.116 v1(50.4,36.616) ; v1(53.627,53.2) 54.8,53.2 55.463,53.863 55.463,58.839 v1(53.902,60.4)
GPIO_D10: U4.3 U14.57 | length 57.7
  Top Layer w0.3: U14.57@31.949,27.76 33.73,27.76 36.92,30.95 50.25,30.95 v1(50.4,30.8) ; U4.3@41.86,63.181 41.86,59.584 v1(44.372,57.072) ; v1(43.846,37.4) 43.846,37.489 46.1,39.743 v1(46.1,52.6)
  Bottom Layer w0.3: v1(43.846,37.4) 43.903,37.343 43.903,37.208 50.161,30.95 50.169,30.95 50.319,30.8 v1(50.4,30.8) ; v1(44.372,57.072) 46.1,55.344 v1(46.1,52.6)
GPIO_D11: U4.4 U14.58 | length 56.8
  Top Layer w0.3: U14.58@31.949,28.26 33.626,28.26 37.033,31.667 50.26,31.667 v1(50.4,31.527) ; U4.4@42.51,63.181 42.51,59.962 v1(44.886,57.586) ; v1(44.573,37.4) 44.573,37.489 46.827,39.743 v1(46.827,52.6)
  Bottom Layer w0.3: v1(44.573,37.4) 44.63,37.343 44.63,37.208 50.161,31.677 50.169,31.677 50.319,31.527 v1(50.4,31.527) ; v1(44.886,57.586) 46.742,55.73 46.742,52.685 v1(46.827,52.6)
GPIO_D12: U4.5 U14.59 | length 55.7
  Top Layer w0.3: U14.59@31.949,28.76 33.522,28.76 37.016,32.254 v1(50.4,32.254) ; U4.5@43.16,63.181 43.16,60.34 v1(45.4,58.1) ; v1(45.3,37.4) 47.554,39.654 v1(47.554,52.6)
  Bottom Layer w0.3: v1(45.3,37.4) 45.357,37.343 45.357,37.208 50.161,32.404 50.169,32.404 50.319,32.254 v1(50.4,32.254) ; v1(45.4,58.1) 47.169,56.331 47.169,54.207 47.554,53.822 v1(47.554,52.6)
GPIO_D13: U5.3 U14.60 | length 56.4
  Top Layer w0.3: U14.60@31.949,29.26 33.418,29.26 37.14,32.981 v1(50.4,32.981) ; v1(46.265,37.5) 46.265,37.589 49.992,41.316 v1(49.992,53.2) ; v1(50.267,60.4) 50.267,60.607 50.46,60.8 U5.3@50.46,63.181
  Bottom Layer w0.3: v1(46.265,37.5) 46.265,37.027 50.311,32.981 v1(50.4,32.981) ; v1(49.992,53.2) 48.78,53.2 47.596,54.384 47.596,57.729 49.39,59.523 v1(50.267,60.4)
GPIO_D14: U5.4 U14.61 | length 55.8
  Top Layer w0.3: U14.61@31.949,29.76 33.315,29.76 37.113,33.558 50.25,33.558 v1(50.4,33.708) ; v1(46.992,37.5) 46.992,37.581 47.142,37.731 47.142,37.739 47.48,38.077 50.719,41.316 v1(50.719,53.2) ; v1(50.994,60.4) 51.11,60.515 U5.4@51.11,63.181
  Bottom Layer w0.3: v1(46.992,37.5) 47.049,37.443 47.049,36.97 50.311,33.708 v1(50.4,33.708) ; v1(50.719,53.2) 50.719,53.281 50.569,53.431 50.569,53.439 49.785,54.223 48.361,54.223 48.023,54.561 48.023,55.039 49.956,56.972 49.956,57.399 50.994,58.437 v1(50.994,60.4)
GPIO_D15: U5.5 U14.62 | length 52.4
  Top Layer w0.3: U14.62@31.949,30.26 33.211,30.26 37.17,34.219 37.231,34.219 37.297,34.285 50.25,34.285 v1(50.4,34.435) ; v1(47.719,37.5) 47.719,37.589 48.207,38.077 51.446,41.316 v1(51.446,53.2) ; v1(51.721,60.4) 51.76,60.438 U5.5@51.76,63.181
  Bottom Layer w0.3: v1(47.719,37.5) 47.719,37.027 50.311,34.435 v1(50.4,34.435) ; v1(51.446,53.2) 51.446,56.309 52.496,57.359 52.496,58.115 51.721,58.889 v1(51.721,60.4)
GPS_ANTENNA: E2.1 MD1.11 | length 21.8
  Top Layer w0.367: MD1.11@120.75,24.7 E2.1@142.6,24.7
GPS_EXTINT: MD1.5 pad.13@38,28.5 U14.17 | length 94.9
  Top Layer w0.3: U14.17@16.849,28.76 26.008,28.76 26.166,28.602 v1(26.247,28.602) ; v1(37.1,28.647) 37.105,28.652 107.416,28.652 107.561,28.797 108.087,28.797 108.884,28 109.673,28 MD1.5@111.25,28
  Bottom Layer w0.3: v1(26.247,28.602) 26.27,28.624 37.078,28.624 v1(37.1,28.647)
GPS_I2C_SCL: MD1.17 pad.13@38,29.9 R40.2 U14.15 | length 107.3
  Top Layer w0.3: U14.15@16.849,29.76 25.56,29.76 25.797,29.997 26.143,29.997 v1(26.2,30.054) ; v1(37.1,30.101) 38.099,30.101 38.694,29.506 107.063,29.506 107.207,29.651 108.051,29.651 v1(108.6,30.2) ; v1(112.577,31.3) MD1.17@120.75,31.3 R40.2@123,31.3
  Bottom Layer w0.3: v1(26.2,30.054) 26.224,30.078 37.076,30.078 v1(37.1,30.101) ; v1(108.6,30.2) 109.7,31.3 v1(112.577,31.3)
GPS_I2C_SDA: MD1.16 pad.13@38,29.2 R39.2 U14.16 | length 106.8
  Top Layer w0.3: U14.16@16.849,29.26 26.052,29.26 26.119,29.327 v1(26.2,29.327) ; v1(37.1,29.373) 37.181,29.373 37.331,29.224 37.339,29.224 37.484,29.079 107.239,29.079 107.384,29.224 108.476,29.224 v1(108.5,29.2) ; v1(112.6,30.2) MD1.16@120.75,30.2 120.784,30.166 122.966,30.166 R39.2@123,30.133
  Bottom Layer w0.3: v1(26.2,29.327) 26.223,29.35 37.077,29.35 v1(37.1,29.373) ; v1(108.5,29.2) 109.5,30.2 v1(112.6,30.2)
GPS_TIMEPULSE: MD1.4 pad.13@38,27.7 U14.18 | length 95.2
  Top Layer w0.3: U14.18@16.849,28.26 21.444,28.26 21.461,28.277 25.756,28.277 26.16,27.873 v1(26.2,27.873) ; v1(37.1,27.92) 38.52,27.92 38.825,28.225 107.775,28.225 v1(107.8,28.2) ; v1(109.4,29.2) 109.481,29.2 109.581,29.1 MD1.4@111.25,29.1
  Bottom Layer w0.3: v1(26.2,27.873) 26.223,27.896 37.077,27.896 v1(37.1,27.92) ; v1(107.8,28.2) 107.857,28.257 108.457,28.257 v1(109.4,29.2)
I2C1_SCL: U14.68
I2C1_SDA: U14.69
IOVDD: U15.48 U16.A1 | length 0.9
  Top Layer w0.127: U15.48@18.048,16.773 U16.A1@18.048,17.623
JTCK-SWCLK: CN1.4 U14.76 | length 34.4
  Top Layer w0.3: CN1.4@28.57,5.77 28.57,9.529 29.074,10.033 29.074,18.558 31.306,20.79 31.306,23.557 30.023,24.84 30.023,33.295 30.412,33.684 30.412,38.297 U14.76@30.399,38.31
JTDI: CN1.8 U14.77 | length 34.6
  Top Layer w0.3: v1(29.5,24.5) 29.5,33.376 29.985,33.861 29.985,36.931 29.9,37.017 U14.77@29.899,38.31 ; v1(30.5,18.9) 30.5,9.758 31.11,9.148 CN1.8@31.11,5.77
  Bottom Layer w0.3: v1(29.5,24.5) 29.5,23.678 28.123,22.301 28.123,21.277 v1(30.5,18.9)
JTDO/TRACESWO: CN1.6 U14.89 | length 35
  Top Layer w0.3: v1@23.9,30.5 U14.89@23.9,38.31 ; v1(29.8,17.5) 29.82,17.48 29.82,5.79 CN1.6@29.84,5.77
  Bottom Layer w0.3: v1(23.9,30.5) 23.9,24.655 27.269,21.286 27.269,20.031 v1(29.8,17.5)
JTMS-SWDIO: CN1.2 U14.72 | length 31.9
  Top Layer w0.3: CN1.2@27.3,5.77 27.3,9.077 28.647,10.424 28.647,21.647 v1(28.7,21.7) ; v1(30.6,25.8) 30.6,33.268 30.839,33.507 30.839,34.904 31.196,35.26 U14.72@31.949,35.26
  Bottom Layer w0.3: v1(28.7,21.7) 30.6,23.6 v1(30.6,25.8)
NetC4_2: C4.2 R1.2 | length 1.1
  Top Layer w0.3: C4.2@3.65,67.279 R1.2@3.65,68.367
NetC9_2: C9.2 R5.1 U2.6 | length 2.1
  Top Layer w0.3: U2.6@5.7,58.55 5.7,59.2 5.9,59.4 R5.1@6.28,59.4 ; R5.1@6.4,59.533 6.4,60.289 6.384,60.305 C9.2@6.4,60.321
NetC12_2: C12.2 R10.2 | length 0.8
  Top Layer w0.3: C12.2@2.2,53.62 2.201,53.619 2.969,53.619 R10.2@2.97,53.618
NetC36_2: C36.2 R36.1 X3.2 | length 7.7
  Top Layer w0.127: X3.2@11.19,23.912 11.777,24.499 11.777,27.495 13.391,29.11 C36.2@14.114,29.11 C36.2@14.127,29.097
  Top Layer w0.3: C36.2@14.127,29.097 R36.1@15.014,29.097
NetC41_1: C41.1 L2.2 L3.1 | length 2.5
  Top Layer w0.367: L2.2@12.202,8.352 C41.1@12.202,10.873
NetC42_1: C42.1 C44.1 C46.1 L1.2 U15.15 U15.32 | length 19.1
  Top Layer w0.127: C42.1@18.648,9.543 18.662,9.543 18.848,9.73 v1(18.848,10.123) U15.15@18.848,10.723 ; v1(22.068,9.946) 22.882,9.133 25.182,9.133 25.893,9.843 25.893,10.71 26.106,10.923 L1.2@26.974,10.923 26.974,11.322 26.36,11.936 26.191,11.936 25.712,12.414 25.712,13.087 26.048,13.423 C46.1@26.07,13.423 C44.1@26.07,14.344 ; U15.32@23.248,14.323 23.738,14.323 24.388,14.973 24.773,14.973 25.323,14.423 C44.1@26.148,14.423 ; C44.1@26.07,14.344 cw(c26.148,14.344) C44.1@26.147,14.423 ; C44.1@26.07,14.344 cw(c26.148,14.344) C44.1@26.148,14.423 ; C44.1@26.07,14.344 cw(c26.148,14.344) C44.1@26.147,14.423 ; C44.1@26.07,14.344 cw(c26.148,14.344) C44.1@26.147,14.423 ; C44.1@26.147,14.423 cw(c26.148,14.344) C44.1@26.148,14.423 ; C44.1@26.147,14.423 cw(c26.148,14.344) C44.1@26.148,14.423
  Bottom Layer w0.127: v1(18.848,10.123) 21.764,10.123 21.94,9.946 v1(22.068,9.946)
NetC55_1: C55.1 DS1.31 | length 1.2
  Top Layer w0.3: DS1.31@71.904,57.737 72.599,58.432 72.599,58.551 72.685,58.637 C55.1@72.707,58.637
NetC55_2: C55.2 C57.1 DS1.30 | length 2.7
  Top Layer w0.3: C55.2@73.464,58.637 73.485,58.637 74.385,57.737 DS1.30@74.444,57.737 74.485,57.737 75.385,58.637 C57.1@75.407,58.637
NetC56_1: C56.1 DS1.32 | length 1.3
  Top Layer w0.3: C56.1@68.464,58.637 68.485,58.637 69.364,57.758 DS1.32@69.364,57.737
NetC57_2: C57.2 DS1.29 | length 1.3
  Top Layer w0.3: C57.2@76.164,58.637 76.185,58.637 76.984,57.838 DS1.29@76.984,57.737
NetC58_1: C58.1 DS1.28 | length 1.3
  Top Layer w0.3: DS1.28@79.524,57.737 79.524,57.754 80.407,58.637 C58.1@80.428,58.637
NetC58_2: C58.2 DS1.27 | length 1.3
  Top Layer w0.3: C58.2@81.185,58.637 81.207,58.637 82.064,57.779 DS1.27@82.064,57.737
NetC59_1: C59.1 DS1.25 | length 1.3
  Top Layer w0.3: C59.1@86.264,58.637 86.285,58.637 87.144,57.778 DS1.25@87.144,57.737
NetC60_1: C60.1 DS1.24 | length 1.3
  Top Layer w0.3: C60.1@88.764,58.637 88.785,58.637 DS1.24@89.684,57.737
NetC61_1: C61.1 DS1.23 | length 1.3
  Top Layer w0.3: C61.1@91.364,58.637 91.385,58.637 92.224,57.798 DS1.23@92.224,57.737
NetC62_1: C62.1 DS1.22 | length 1.3
  Top Layer w0.3: C62.1@93.864,58.637 93.885,58.637 94.764,57.758 DS1.22@94.764,57.737
NetC63_1: C63.1 DS1.21 | length 1.3
  Top Layer w0.3: C63.1@96.364,58.637 96.385,58.637 97.285,57.737 DS1.21@97.304,57.737
NetC64_2: C64.2 U17.2 U17.7 U18.3 | length 4.5
  Top Layer w0.3: U17.7@14.46,46.05 U17.2@15.74,46.05 15.75,46.06 U18.3@16.76,46.06 ; C64.2@16.6,44.579 16.6,45.9 U18.3@16.76,46.06 ; U18.3@17.35,46.2 16.9,46.2 U18.3@16.76,46.06
NetD1_2: D1.2 U1.12
NetE1_1: E1.1 L2.1
NetQ1_1: Q1.1 U2.7 | length 6
  Top Layer w0.3: U2.7@5.2,58.55 5.2,59.325 5.6,59.725 5.6,63.825 Q1.1@6,64.225
NetQ1_3: Q1.3 R5.2 R8.2 | length 10.1
  Top Layer w0.127: R5.2@6.4,58.667 6.4,57.5 6.6,57.3 6.8,57.3 7.1,57.6 R8.2@7.1,57.675
  Top Layer w0.6: Q1.3@10.6,63.725 Q1.3@10.6,64.225
  Top Layer w1: R8.2@7.1,57.675 7.4,57.975 7.4,60.525 Q1.3@10.6,63.725
NetQ1_4: Q1.4 R1.1 U1.3 U1.4 U1.5 U1.6 | length 5.4
  Top Layer w0.3: R1.1@3.65,69.233 6.408,69.233 Q1.4@8.3,71.125
NetQ2_tube1_1: Q2_tube1.1 R12_tube1.2 | length 2.5
  Top Layer w0.3: R12_tube1.2@151.377,132.7 Q2_tube1.1@151.377,134.04 ; Q2_tube1.1@151.269,134.3 cw(c151.009,134.04) Q2_tube1.1@151.377,134.04 ; Q2_tube1.1@151.269,134.3 cw(c151.009,134.04) Q2_tube1.1@151.377,134.04 ; Q2_tube1.1@151.269,134.3 cw(c151.009,134.04) Q2_tube1.1@151.377,134.04 ; Q2_tube1.1@151.269,134.3 cw(c151.009,134.04) Q2_tube1.1@151.377,134.04
NetQ2_tube2_1: Q2_tube2.1 R12_tube2.2 | length 2.5
  Top Layer w0.3: R12_tube2.2@126.677,132.7 Q2_tube2.1@126.677,134.04 ; Q2_tube2.1@126.569,134.3 cw(c126.309,134.04) Q2_tube2.1@126.677,134.04 ; Q2_tube2.1@126.569,134.3 cw(c126.309,134.04) Q2_tube2.1@126.677,134.04 ; Q2_tube2.1@126.569,134.3 cw(c126.309,134.04) Q2_tube2.1@126.677,134.04 ; Q2_tube2.1@126.569,134.3 cw(c126.309,134.04) Q2_tube2.1@126.677,134.04
NetQ2_tube3_1: Q2_tube3.1 R12_tube3.2 | length 2.5
  Top Layer w0.3: R12_tube3.2@95.777,132.7 Q2_tube3.1@95.777,134.04 ; Q2_tube3.1@95.669,134.3 cw(c95.409,134.04) Q2_tube3.1@95.777,134.04 ; Q2_tube3.1@95.669,134.3 cw(c95.409,134.04) Q2_tube3.1@95.777,134.04 ; Q2_tube3.1@95.669,134.3 cw(c95.409,134.04) Q2_tube3.1@95.777,134.04 ; Q2_tube3.1@95.669,134.3 cw(c95.409,134.04) Q2_tube3.1@95.777,134.04
NetQ2_tube4_1: Q2_tube4.1 R12_tube4.2 | length 2.5
  Top Layer w0.3: R12_tube4.2@71.077,132.7 Q2_tube4.1@71.077,134.04 ; Q2_tube4.1@70.969,134.3 cw(c70.709,134.04) Q2_tube4.1@71.077,134.04 ; Q2_tube4.1@70.969,134.3 cw(c70.709,134.04) Q2_tube4.1@71.077,134.04 ; Q2_tube4.1@70.969,134.3 cw(c70.709,134.04) Q2_tube4.1@71.077,134.04 ; Q2_tube4.1@70.969,134.3 cw(c70.709,134.04) Q2_tube4.1@71.077,134.04
NetQ2_tube5_1: Q2_tube5.1 R12_tube5.2 | length 2.5
  Top Layer w0.3: R12_tube5.2@40.177,132.7 Q2_tube5.1@40.177,134.04 ; Q2_tube5.1@40.069,134.3 cw(c39.809,134.04) Q2_tube5.1@40.177,134.04 ; Q2_tube5.1@40.069,134.3 cw(c39.809,134.04) Q2_tube5.1@40.177,134.04 ; Q2_tube5.1@40.069,134.3 cw(c39.809,134.04) Q2_tube5.1@40.177,134.04 ; Q2_tube5.1@40.069,134.3 cw(c39.809,134.04) Q2_tube5.1@40.177,134.04
NetQ2_tube6_1: Q2_tube6.1 R12_tube6.2 | length 2.5
  Top Layer w0.3: R12_tube6.2@15.477,132.7 Q2_tube6.1@15.477,134.04 ; Q2_tube6.1@15.369,134.3 cw(c15.109,134.04) Q2_tube6.1@15.477,134.04 ; Q2_tube6.1@15.369,134.3 cw(c15.109,134.04) Q2_tube6.1@15.477,134.04 ; Q2_tube6.1@15.369,134.3 cw(c15.109,134.04) Q2_tube6.1@15.477,134.04 ; Q2_tube6.1@15.369,134.3 cw(c15.109,134.04) Q2_tube6.1@15.477,134.04
NetQ3_tube1_1: Q3_tube1.1 R14_tube1.2 | length 2.7
  Top Layer w0.3: R14_tube1.2@151.433,125.1 Q3_tube1.1@151.433,126.379 ; Q3_tube1.1@151.3,126.7 cw(c150.979,126.379) Q3_tube1.1@151.433,126.379 ; Q3_tube1.1@151.3,126.7 cw(c150.979,126.379) Q3_tube1.1@151.433,126.379 ; Q3_tube1.1@151.3,126.7 cw(c150.979,126.379) Q3_tube1.1@151.433,126.379 ; Q3_tube1.1@151.3,126.7 cw(c150.979,126.379) Q3_tube1.1@151.433,126.379
NetQ3_tube2_1: Q3_tube2.1 R14_tube2.2 | length 2.7
  Top Layer w0.3: R14_tube2.2@126.733,125.1 Q3_tube2.1@126.733,126.379 ; Q3_tube2.1@126.6,126.7 cw(c126.279,126.379) Q3_tube2.1@126.733,126.379 ; Q3_tube2.1@126.6,126.7 cw(c126.279,126.379) Q3_tube2.1@126.733,126.379 ; Q3_tube2.1@126.6,126.7 cw(c126.279,126.379) Q3_tube2.1@126.733,126.379 ; Q3_tube2.1@126.6,126.7 cw(c126.279,126.379) Q3_tube2.1@126.733,126.379
NetQ3_tube3_1: Q3_tube3.1 R14_tube3.2 | length 2.7
  Top Layer w0.3: R14_tube3.2@95.833,125.1 Q3_tube3.1@95.833,126.379 ; Q3_tube3.1@95.7,126.7 cw(c95.379,126.379) Q3_tube3.1@95.833,126.379 ; Q3_tube3.1@95.7,126.7 cw(c95.379,126.379) Q3_tube3.1@95.833,126.379 ; Q3_tube3.1@95.7,126.7 cw(c95.379,126.379) Q3_tube3.1@95.833,126.379 ; Q3_tube3.1@95.7,126.7 cw(c95.379,126.379) Q3_tube3.1@95.833,126.379
NetQ3_tube4_1: Q3_tube4.1 R14_tube4.2 | length 2.7
  Top Layer w0.3: R14_tube4.2@71.133,125.1 Q3_tube4.1@71.133,126.379 ; Q3_tube4.1@71,126.7 cw(c70.679,126.379) Q3_tube4.1@71.133,126.379 ; Q3_tube4.1@71,126.7 cw(c70.679,126.379) Q3_tube4.1@71.133,126.379 ; Q3_tube4.1@71,126.7 cw(c70.679,126.379) Q3_tube4.1@71.133,126.379 ; Q3_tube4.1@71,126.7 cw(c70.679,126.379) Q3_tube4.1@71.133,126.379
NetQ3_tube5_1: Q3_tube5.1 R14_tube5.2 | length 2.7
  Top Layer w0.3: R14_tube5.2@40.233,125.1 Q3_tube5.1@40.233,126.379 ; Q3_tube5.1@40.1,126.7 cw(c39.779,126.379) Q3_tube5.1@40.233,126.379 ; Q3_tube5.1@40.1,126.7 cw(c39.779,126.379) Q3_tube5.1@40.233,126.379 ; Q3_tube5.1@40.1,126.7 cw(c39.779,126.379) Q3_tube5.1@40.233,126.379 ; Q3_tube5.1@40.1,126.7 cw(c39.779,126.379) Q3_tube5.1@40.233,126.379
NetQ3_tube6_1: Q3_tube6.1 R14_tube6.2 | length 2.7
  Top Layer w0.3: R14_tube6.2@15.533,125.1 Q3_tube6.1@15.533,126.379 ; Q3_tube6.1@15.4,126.7 cw(c15.079,126.379) Q3_tube6.1@15.533,126.379 ; Q3_tube6.1@15.4,126.7 cw(c15.079,126.379) Q3_tube6.1@15.533,126.379 ; Q3_tube6.1@15.4,126.7 cw(c15.079,126.379) Q3_tube6.1@15.533,126.379 ; Q3_tube6.1@15.4,126.7 cw(c15.079,126.379) Q3_tube6.1@15.533,126.379
NetQ4_tube1_1: Q4_tube1.1 R16_tube1.2 | length 2.7
  Top Layer w0.3: R16_tube1.2@139.558,132.6 Q4_tube1.1@139.558,133.879 ; Q4_tube1.1@139.425,134.2 cw(c139.104,133.879) Q4_tube1.1@139.558,133.879 ; Q4_tube1.1@139.425,134.2 cw(c139.104,133.879) Q4_tube1.1@139.558,133.879 ; Q4_tube1.1@139.425,134.2 cw(c139.104,133.879) Q4_tube1.1@139.558,133.879 ; Q4_tube1.1@139.425,134.2 cw(c139.104,133.879) Q4_tube1.1@139.558,133.879
NetQ4_tube2_1: Q4_tube2.1 R16_tube2.2 | length 2.7
  Top Layer w0.3: R16_tube2.2@114.858,132.6 Q4_tube2.1@114.858,133.879 ; Q4_tube2.1@114.725,134.2 cw(c114.404,133.879) Q4_tube2.1@114.858,133.879 ; Q4_tube2.1@114.725,134.2 cw(c114.404,133.879) Q4_tube2.1@114.858,133.879 ; Q4_tube2.1@114.725,134.2 cw(c114.404,133.879) Q4_tube2.1@114.858,133.879 ; Q4_tube2.1@114.725,134.2 cw(c114.404,133.879) Q4_tube2.1@114.858,133.879
NetQ4_tube3_1: Q4_tube3.1 R16_tube3.2 | length 2.7
  Top Layer w0.3: R16_tube3.2@83.958,132.6 Q4_tube3.1@83.958,133.879 ; Q4_tube3.1@83.825,134.2 cw(c83.504,133.879) Q4_tube3.1@83.958,133.879 ; Q4_tube3.1@83.825,134.2 cw(c83.504,133.879) Q4_tube3.1@83.958,133.879 ; Q4_tube3.1@83.825,134.2 cw(c83.504,133.879) Q4_tube3.1@83.958,133.879 ; Q4_tube3.1@83.825,134.2 cw(c83.504,133.879) Q4_tube3.1@83.958,133.879
NetQ4_tube4_1: Q4_tube4.1 R16_tube4.2 | length 2.7
  Top Layer w0.3: R16_tube4.2@59.258,132.6 Q4_tube4.1@59.258,133.879 ; Q4_tube4.1@59.125,134.2 cw(c58.804,133.879) Q4_tube4.1@59.258,133.879 ; Q4_tube4.1@59.125,134.2 cw(c58.804,133.879) Q4_tube4.1@59.258,133.879 ; Q4_tube4.1@59.125,134.2 cw(c58.804,133.879) Q4_tube4.1@59.258,133.879 ; Q4_tube4.1@59.125,134.2 cw(c58.804,133.879) Q4_tube4.1@59.258,133.879
NetQ4_tube5_1: Q4_tube5.1 R16_tube5.2 | length 2.7
  Top Layer w0.3: R16_tube5.2@28.358,132.6 Q4_tube5.1@28.358,133.879 ; Q4_tube5.1@28.225,134.2 cw(c27.904,133.879) Q4_tube5.1@28.358,133.879 ; Q4_tube5.1@28.225,134.2 cw(c27.904,133.879) Q4_tube5.1@28.358,133.879 ; Q4_tube5.1@28.225,134.2 cw(c27.904,133.879) Q4_tube5.1@28.358,133.879 ; Q4_tube5.1@28.225,134.2 cw(c27.904,133.879) Q4_tube5.1@28.358,133.879
NetQ4_tube6_1: Q4_tube6.1 R16_tube6.2 | length 2.7
  Top Layer w0.3: R16_tube6.2@3.658,132.6 Q4_tube6.1@3.658,133.879 ; Q4_tube6.1@3.525,134.2 cw(c3.204,133.879) Q4_tube6.1@3.658,133.879 ; Q4_tube6.1@3.525,134.2 cw(c3.204,133.879) Q4_tube6.1@3.658,133.879 ; Q4_tube6.1@3.525,134.2 cw(c3.204,133.879) Q4_tube6.1@3.658,133.879 ; Q4_tube6.1@3.525,134.2 cw(c3.204,133.879) Q4_tube6.1@3.658,133.879
NetQ5_tube1_1: Q5_tube1.1 R18_tube1.2 | length 2.7
  Top Layer w0.3: R18_tube1.2@139.358,125.1 Q5_tube1.1@139.358,126.379 ; Q5_tube1.1@139.225,126.7 cw(c138.904,126.379) Q5_tube1.1@139.358,126.379 ; Q5_tube1.1@139.225,126.7 cw(c138.904,126.379) Q5_tube1.1@139.358,126.379 ; Q5_tube1.1@139.225,126.7 cw(c138.904,126.379) Q5_tube1.1@139.358,126.379 ; Q5_tube1.1@139.225,126.7 cw(c138.904,126.379) Q5_tube1.1@139.358,126.379
NetQ5_tube2_1: Q5_tube2.1 R18_tube2.2 | length 2.7
  Top Layer w0.3: R18_tube2.2@114.658,125.1 Q5_tube2.1@114.658,126.379 ; Q5_tube2.1@114.525,126.7 cw(c114.204,126.379) Q5_tube2.1@114.658,126.379 ; Q5_tube2.1@114.525,126.7 cw(c114.204,126.379) Q5_tube2.1@114.658,126.379 ; Q5_tube2.1@114.525,126.7 cw(c114.204,126.379) Q5_tube2.1@114.658,126.379 ; Q5_tube2.1@114.525,126.7 cw(c114.204,126.379) Q5_tube2.1@114.658,126.379
NetQ5_tube3_1: Q5_tube3.1 R18_tube3.2 | length 2.7
  Top Layer w0.3: R18_tube3.2@83.758,125.1 Q5_tube3.1@83.758,126.379 ; Q5_tube3.1@83.625,126.7 cw(c83.304,126.379) Q5_tube3.1@83.758,126.379 ; Q5_tube3.1@83.625,126.7 cw(c83.304,126.379) Q5_tube3.1@83.758,126.379 ; Q5_tube3.1@83.625,126.7 cw(c83.304,126.379) Q5_tube3.1@83.758,126.379 ; Q5_tube3.1@83.625,126.7 cw(c83.304,126.379) Q5_tube3.1@83.758,126.379
NetQ5_tube4_1: Q5_tube4.1 R18_tube4.2 | length 2.7
  Top Layer w0.3: R18_tube4.2@59.058,125.1 Q5_tube4.1@59.058,126.379 ; Q5_tube4.1@58.925,126.7 cw(c58.604,126.379) Q5_tube4.1@59.058,126.379 ; Q5_tube4.1@58.925,126.7 cw(c58.604,126.379) Q5_tube4.1@59.058,126.379 ; Q5_tube4.1@58.925,126.7 cw(c58.604,126.379) Q5_tube4.1@59.058,126.379 ; Q5_tube4.1@58.925,126.7 cw(c58.604,126.379) Q5_tube4.1@59.058,126.379
NetQ5_tube5_1: Q5_tube5.1 R18_tube5.2 | length 2.7
  Top Layer w0.3: R18_tube5.2@28.158,125.1 Q5_tube5.1@28.158,126.379 ; Q5_tube5.1@28.025,126.7 cw(c27.704,126.379) Q5_tube5.1@28.158,126.379 ; Q5_tube5.1@28.025,126.7 cw(c27.704,126.379) Q5_tube5.1@28.158,126.379 ; Q5_tube5.1@28.025,126.7 cw(c27.704,126.379) Q5_tube5.1@28.158,126.379 ; Q5_tube5.1@28.025,126.7 cw(c27.704,126.379) Q5_tube5.1@28.158,126.379